# Altium PCB draft2.PcbDoc (part 2 of 2)
Units mm, origin at the board's own origin, x right, y up, seen from the top; angles counter-clockwise.
Board outline 152.4 x 101.6 mm, 2 copper layers (Top Layer, Bottom Layer); 122 components, 129 nets, 542 pads, 17 vias.
Unrouted connection lines stored in the file: 308.
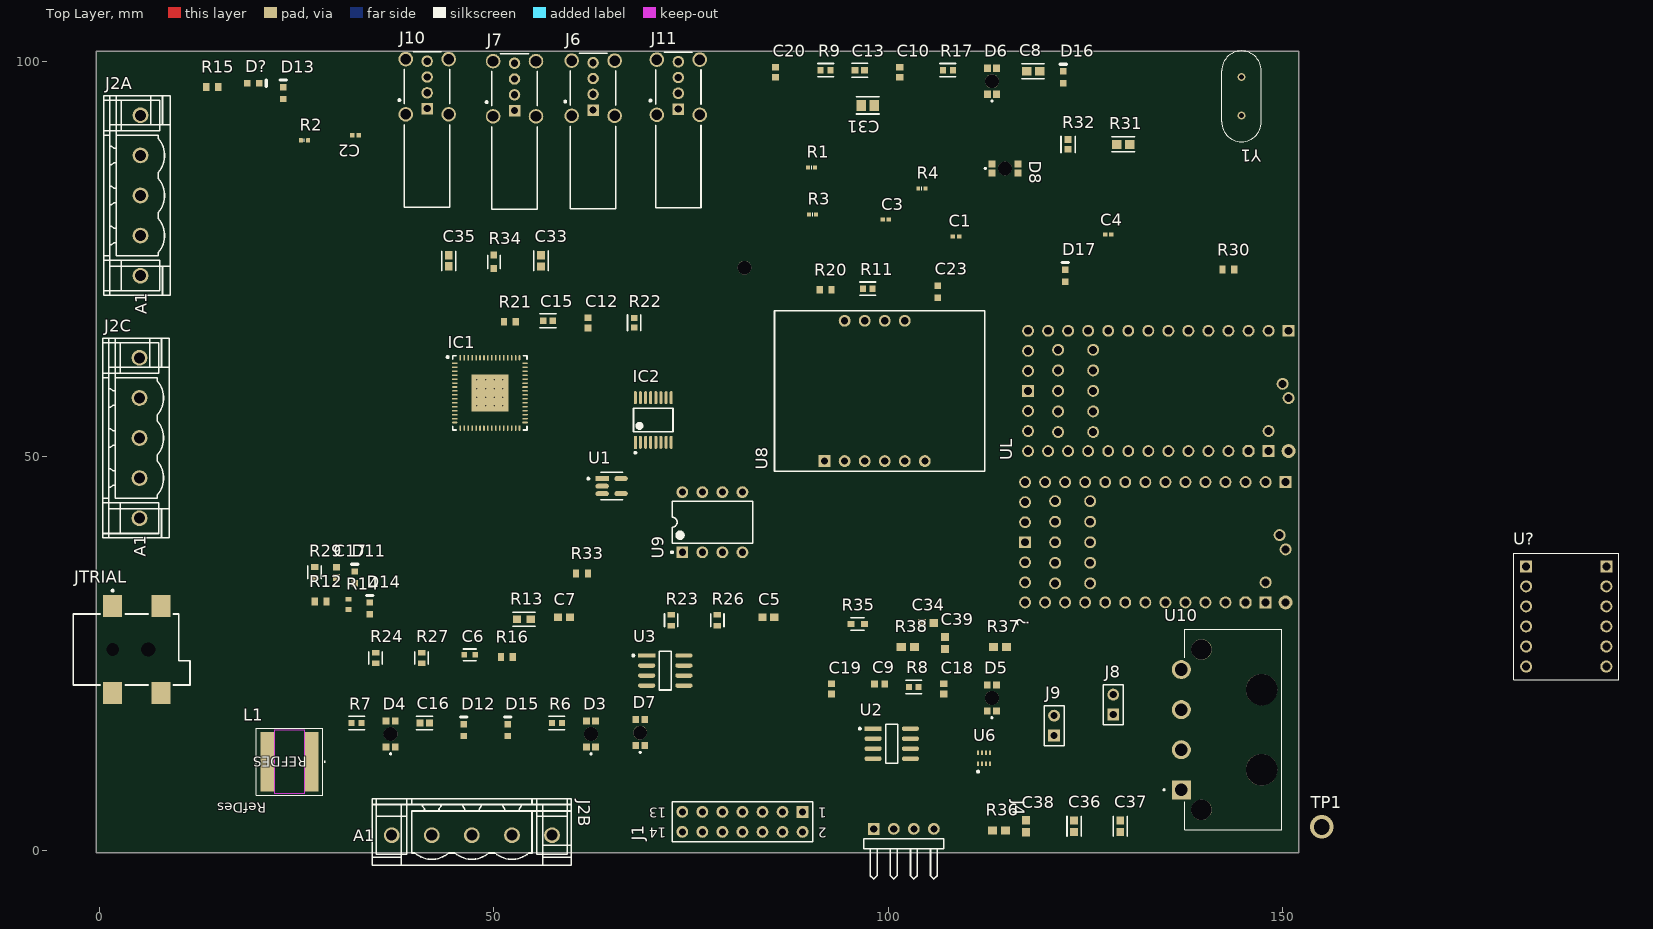
[diagram p0: Top Layer view]

## Via types
v1: diameter 0.5, hole 0.2, Top Layer to Bottom Layer, 16 vias
v2: diameter 3, hole 2, Top Layer to Bottom Layer, 1 vias

## Nets (pads, with @x,y where several pads share a name; then routed paths per layer and width w, separated by ;. In a path a pad name is that pad's centre, name@x,y a point inside that pad or via, vN(x,y) a via of type N, cw(c..) or ccw(c..) an arc to the next point about the centre after c; other vN are vias at no path point) (continued)
WIL3: J1.5 UL.8-TX2/IN1
WIL5.SIG: J1.14 UL.2-OUT2
WIL6.CHA: J1.10 UL.15-A1/RX3/S-PDIF_IN
WIL6.CHB: J1.12 UL.14-A0/TX3/S-PFI_OUT
WIL6.IDX: J1.9 UL.20-A6/TX5/LRCLK1
XTAL1: C22.2 IC1.61 R22.2 Y1.1
XTAL2: C23.2 IC1.60 R22.1 Y1.2
pads on no net: ?.0-RX1 ?.1-TX1 ?.3-LRCLK2 ?.3V3-1 ?.3V3-2 ?.4-BCLK2 ?.5-IN2 ?.6-OUT1D ?.7-RX2/OUT1A ?.8-TX2/IN1 ?.9-OUT1C ?.10-CS/MQSR ?.11-MOSI/CTX1 ?.12-MIO/MQSL ?.13-SCK/CRX1/LED ?.16-A2/RX4/SCL1 ?.17-A3/TX4/SDA1 ?.20-A6/TX5/LRCLK1 ?.21-A7/RX5/BCLK1 ?.24-A10/TX6/SCL2 ?.25-A11/SDA2 ?.26-A12/MOSI1 ?.27-A13/SCK1 ?.28-RX7 ?.29-TX7 ?.30-CRX3 ?.31-CTX3 ?.32-OUTB1 ?.33-MCLK2 ?.ON/OFF ?.PROGRAM ?.VBAT ?.VUSB D2.MH1 D3.MH1 D4.MH1 D5.MH1 D6.MH1 D7.MH1 D8.MH1 D17.2 IC1.24 IC1.40 IC1.46 IC2.9 IC2.10 IC2.11 IC2.12 IC2.13 IC2.14 J2A.0 J2B.0 J2C.0 JTRIAL.3 JTRIAL.MH1 JTRIAL.MH2 U1.4 U5.3 U5.4 U5.5 U6.1 U9.5 U9.6 U9.7 U10. U?.HV4 U?.LV4 UL.3-LRCLK2 UL.3V3-1 UL.3V3-2 UL.4-BCLK2 UL.5-IN2 UL.6-OUT1D UL.7-RX2/OUT1A UL.9-OUT1C UL.10-CS/MQSR UL.11-MOSI/CTX1 UL.12-MIO/MQSL UL.13-SCK/CRX1/LED UL.16-A2/RX4/SCL1 UL.17-A3/TX4/SDA1 UL.18-A4/SDA0 UL.19-A5/SCL0 UL.21-A7/RX5/BCLK1 UL.22-A8/CTX1 UL.23-A9/CRX1/CCLK1 UL.24-A10/TX6/SCL2 UL.25-A11/SDA2 UL.26-A12/MOSI1 UL.27-A13/SCK1 UL.28-RX7 UL.29-TX7 UL.30-CRX3 UL.31-CTX3 UL.32-OUTB1 UL.33-MCLK2 UL.ON/OFF UL.PROGRAM UL.VBAT UL.VUSB
copper on no net:
  other v2: 154.94,3.048

## Text inside footprints (layer, text, board x,y; h text height)
?: Mechanical 7 "COIN CEL" at 121.92,44.882 h0.94 r180; Mechanical 7 "3 VOLT" at 121.412,44.196 h0.94 r180; Mechanical 7 "USB" at 149.098,40.386 h1.97 r270; Mechanical 7 "TEENSY 4.0" at 140.208,39.116 h1.97 r180
J1: Top Overlay "2" at 92.202,2.921 h1.27 r180; Top Overlay "1" at 92.202,5.461 h1.27 r180; Top Overlay "14" at 71.882,2.921 h1.27 r180; Top Overlay "13" at 71.882,5.461 h1.27 r180
J2A: Top Overlay "A1" at 6.036,68.036 h1.5 r90
J2B: Top Overlay "A1" at 32.222,1.203 h1.5
J2C: Top Overlay "A1" at 5.909,37.302 h1.5 r90
L1: Top Overlay "RefDes" at 21.209,6.096 h1.27 r180; Top Overlay "REFDES" at 26.352,11.938 h1.27 r180; Mechanical 13 "RefDes2" at 26.352,11.938 h1.27 r180
UL: Mechanical 7 "TEENSY 4.0" at 140.589,58.293 h1.97 r180; Mechanical 7 "USB" at 149.479,59.563 h1.97 r270; Mechanical 7 "3 VOLT" at 121.793,63.373 h0.94 r180; Mechanical 7 "COIN CEL" at 122.301,64.059 h0.94 r180